# Altium PCB 7-seg-display-2-digits.PcbDoc
Units mm, origin at the board's own origin, x right, y up, seen from the top; angles counter-clockwise.
Board outline 110 x 82 mm, 2 copper layers (Top Layer, Bottom Layer); 47 components, 45 nets, 145 pads, 195 vias.
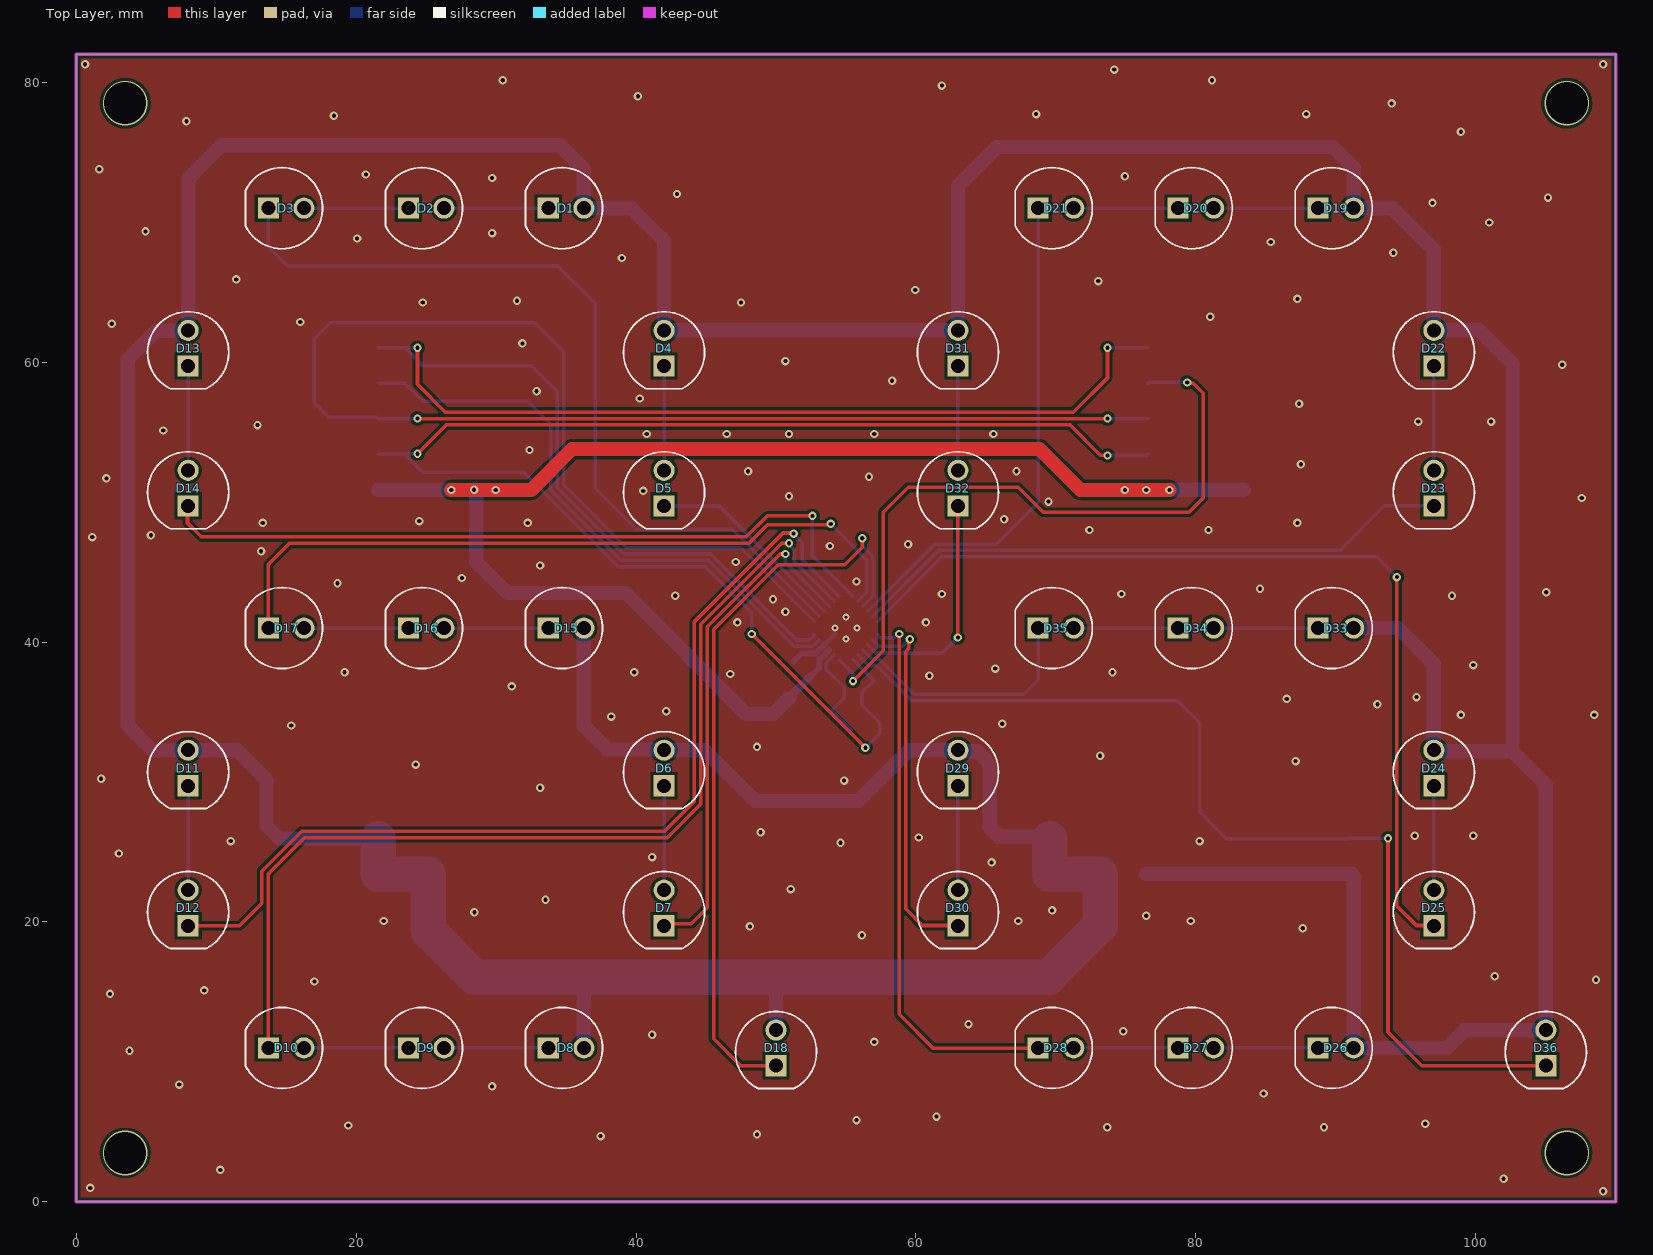
[diagram p0: Top Layer view]
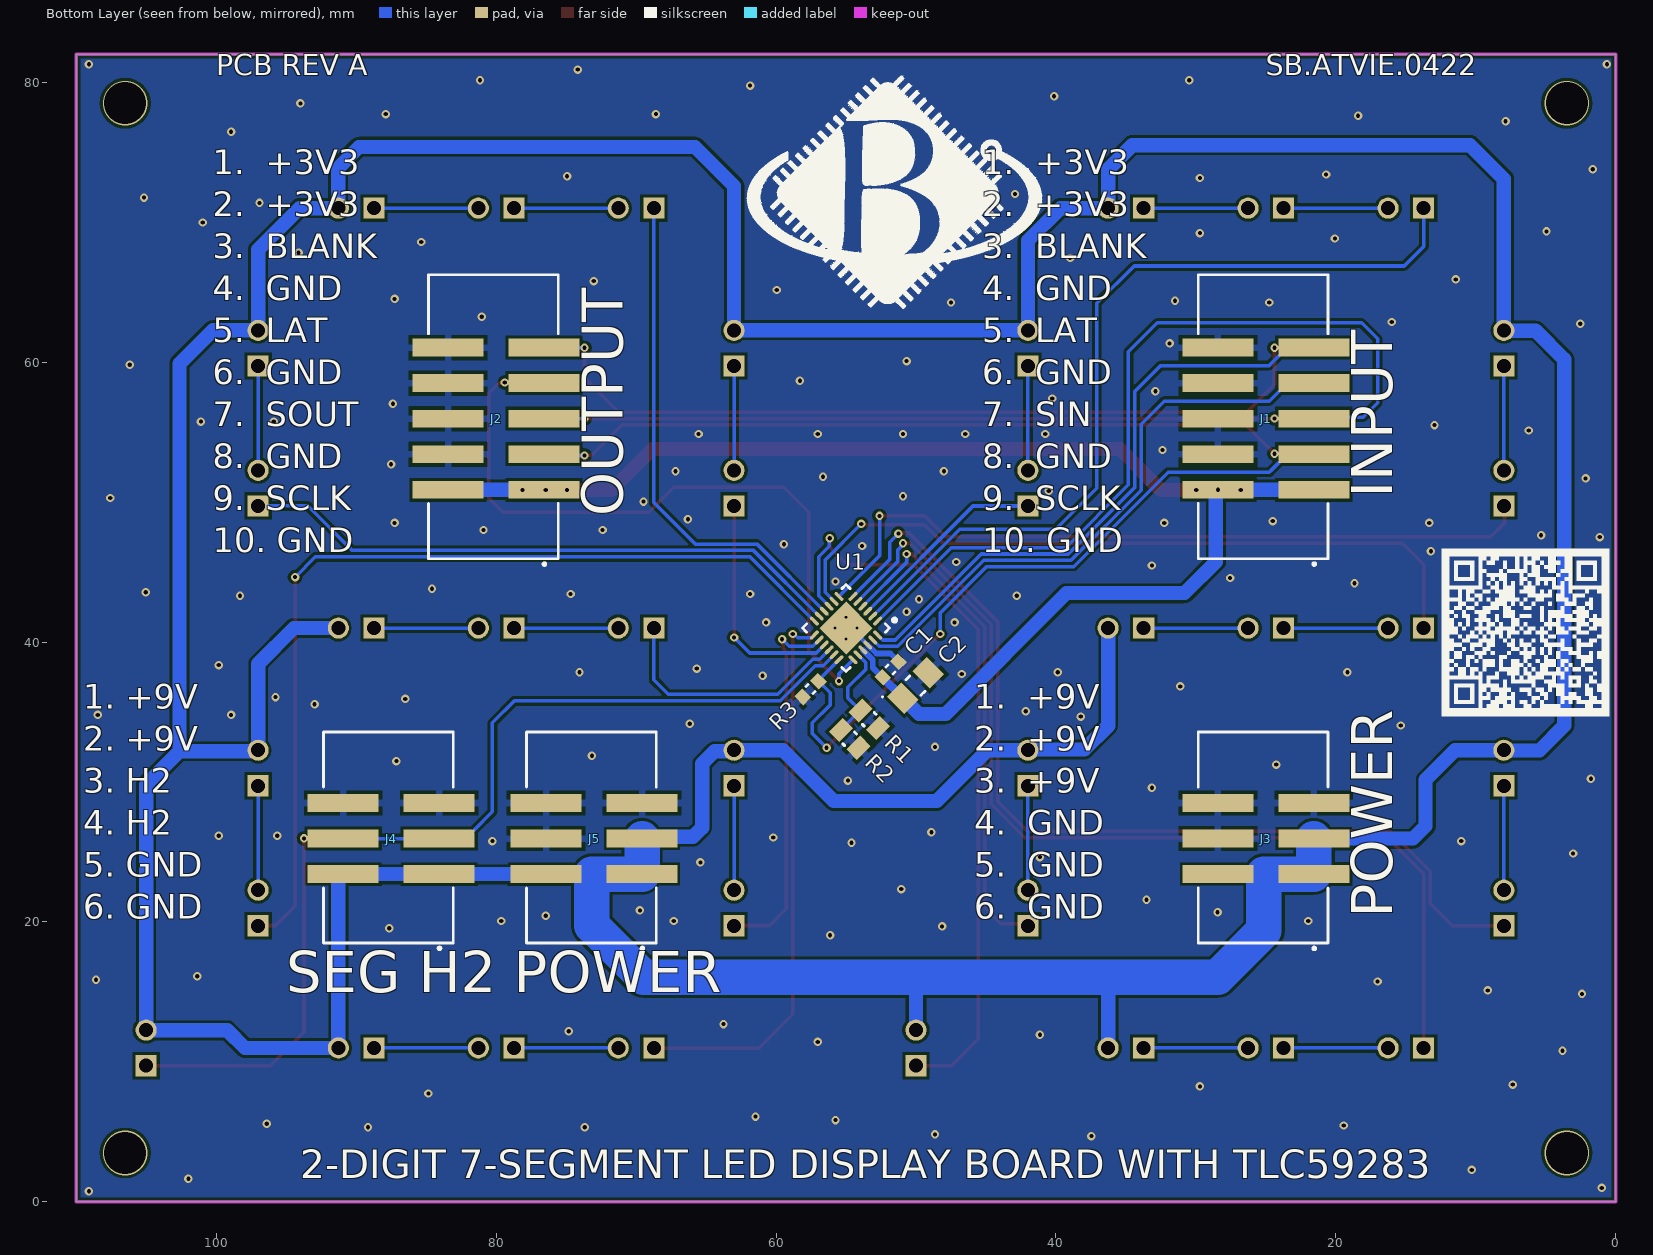
[diagram p1: Bottom Layer view, seen from below]
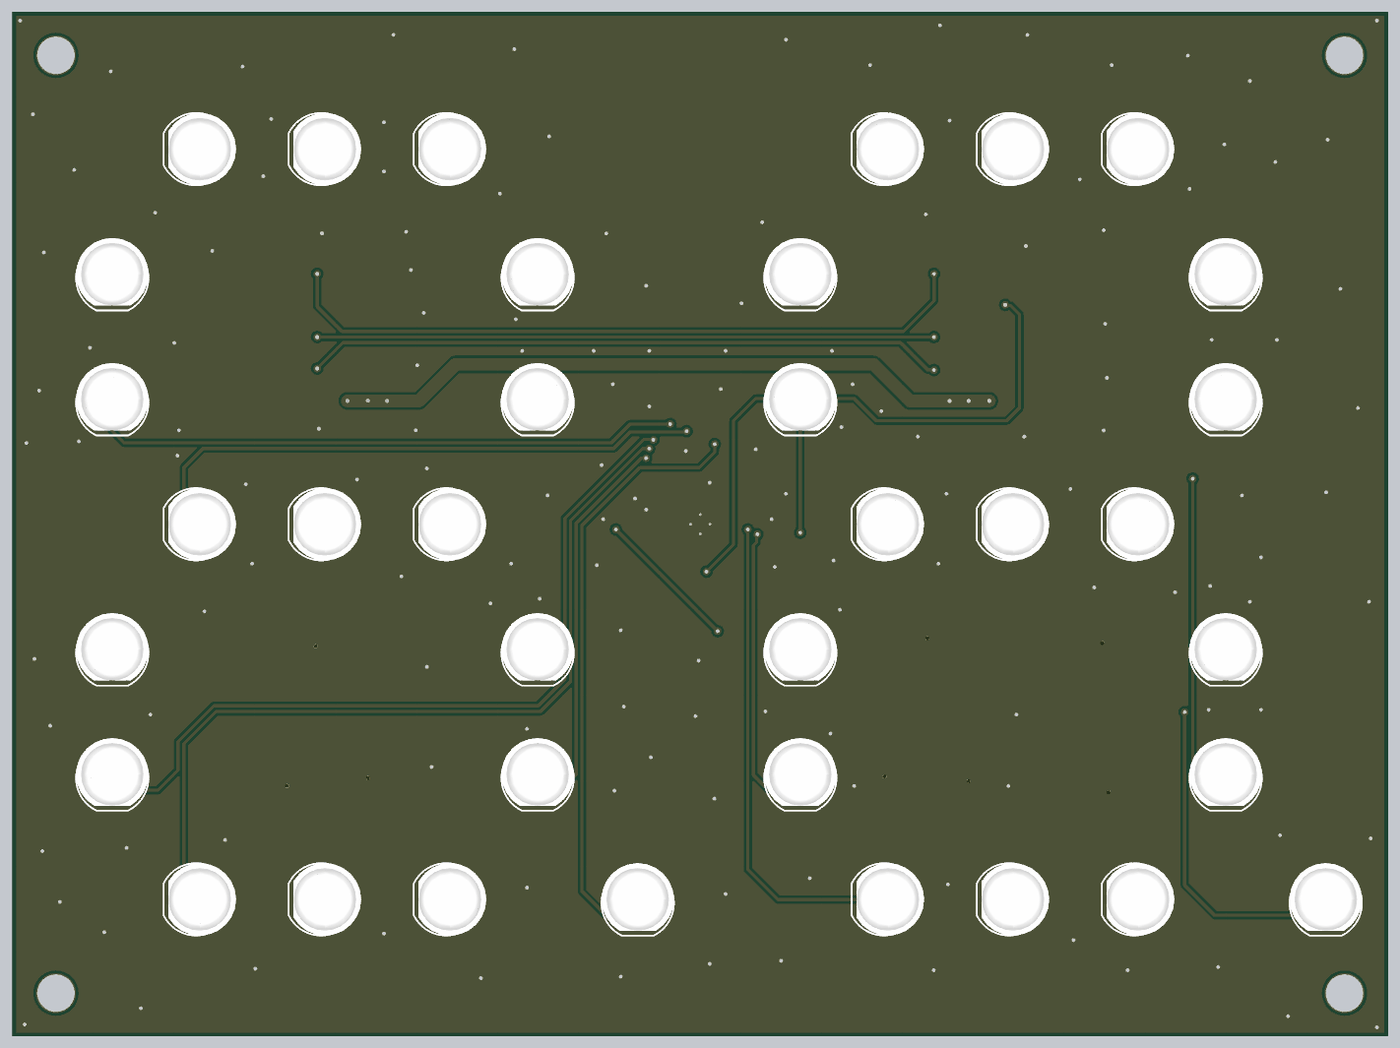
[diagram p2: 3D render of the assembled board from above, using the file's embedded part models]

## Layer stack, top to bottom
Top Solder: solder mask 0.0102, Solder Resist, Dk 3.5
Top Layer: signal copper 0.0356
Dielectric 1: dielectric 0.32, FR-4, Dk 4.8
Bottom Layer: signal copper 0.0356
Bottom Solder: solder mask 0.0102, Solder Resist, Dk 3.5

## Board outline
0,0 110,0 110,82 0,82

## Design rules (kind name [scope] priority, off if disabled: settings)
BoardOutlineClearance [All] p1: gap=0.051 ignorepadtopadclearanceinfootprint=FALSE except(0.4: Arc-SplitBarrior Arc-SplitContinuation Track-SplitBarrior Track-SplitContinuation SMDPad-SplitBarrior SMDPad-SplitContinuation THPad-SplitBarrior THPad-SplitContinuation Via-SplitBarrior Via-SplitContinuation Fill-SplitBarrior Fill-SplitContinuation Poly-SplitBarrior Poly-SplitContinuation Region-SplitBarrior Region-SplitContinuation Text-SplitBarrior Text-SplitContinuation)
Clearance "Clearance Bottom Layer" [OnLayer('Bottom Layer')] p1: gap=0.203 ignorepadtopadclearanceinfootprint=TRUE except(0.051: Arc-Arc Arc-Track Arc-SMDPad Track-Track Track-SMDPad SMDPad-SMDPad; 0.254: Arc-Text Track-Text SMDPad-Text THPad-Text Via-Text Fill-Text Poly-Text Region-Text Text-Text)
Clearance "Clearance Top Layer" [OnLayer('Top Layer')] p2: gap=0.203 ignorepadtopadclearanceinfootprint=TRUE except(0.254: Arc-Text Track-Text SMDPad-Text THPad-Text Via-Text Fill-Text Poly-Text Region-Text Text-Text)
Clearance [All] p3: gap=0.2 ignorepadtopadclearanceinfootprint=FALSE except(0.089: Arc-Arc Arc-Track Arc-SMDPad Track-Track Track-SMDPad SMDPad-SMDPad; 0.127: Arc-Via Track-Via SMDPad-Via THPad-Via Via-Via; 0.254: Arc-Text Track-Text SMDPad-Text THPad-Text Via-Text Fill-Text Poly-Text Region-Text Text-Text)
HoleSize [All] p1: absolutevalues=TRUE maxlimit=6.3 minlimit=0.2 maxpercent=80.000 minpercent=20.000
MinimumAnnularRing [All] p1: minimumring=0.076
MinimumSolderMaskSliver [All] p1: minsoldermaskwidth=0.025
PolygonConnect PolygonConnect_1 [All] p1: thpad.connectstyle=Relief thpad.reliefconductorwidth=0.508 thpad.reliefentries=4 thpad.polygonreliefangle="90 Angle" thpad.airgapwidth=0.254 smdpad.connectstyle=Relief smdpad.reliefconductorwidth=0.508 smdpad.reliefentries=4 smdpad.polygonreliefangle="90 Angle" smdpad.airgapwidth=0.254 via.connectstyle=Direct via.reliefconductorwidth=0.508 via.reliefentries=4 via.polygonreliefangle="90 Angle" via.airgapwidth=0.254
RoutingCorners [All] p1: cornerstyle=Round minsetback=2.54 maxsetback=2.54
RoutingVias [All] p1: holewidth=0.3 width=0.6 viastyle="Through Hole" minholewidth=0.3 minwidth=0.6 maxholewidth=1 maxwidth=2
SilkToSilkClearance [All] p1: silktosilkclearance=0.051
SilkToSolderMaskClearance [IsPad] p1: minsilkscreentomaskgap=0.051 clearancetoexposedcopper=TRUE
SolderMaskExpansion [All] p1: expansion=0.102
Width [All] p1: maxlimit=2.54 minlimit=0.089 preferedwidth=0.381
25 further rules are at their usual default settings.

## Components (designator, comment, footprint, x,y, rotation, side; value= is the part's Value field where it differs from the comment)
C1 "100nF/16V" "SMD 0603 GENERIC" 51.816,38.037 r315 bottom
C2 "10uF/16V" "SMD 1206 POLARIZED" 50.038,36.894 r135 bottom
D1 "OPT GEN LED 5MM" "THT LED 5MM" 35,71 r0 top locked
D2 "OPT GEN LED 5MM" "THT LED 5MM" 25,71 r0 top locked
D3 "OPT GEN LED 5MM" "THT LED 5MM" 15,71 r0 top locked
D4 "OPT GEN LED 5MM" "THT LED 5MM" 42,61 r90 top locked
D5 "OPT GEN LED 5MM" "THT LED 5MM" 42,51 r90 top locked
D6 "OPT GEN LED 5MM" "THT LED 5MM" 42,31 r90 top locked
D7 "OPT GEN LED 5MM" "THT LED 5MM" 42,21 r90 top locked
D8 "OPT GEN LED 5MM" "THT LED 5MM" 35,11 r0 top locked
D9 "OPT GEN LED 5MM" "THT LED 5MM" 25,11 r0 top locked
D10 "OPT GEN LED 5MM" "THT LED 5MM" 15,11 r0 top locked
D11 "OPT GEN LED 5MM" "THT LED 5MM" 8,31 r90 top locked
D12 "OPT GEN LED 5MM" "THT LED 5MM" 8,21 r90 top locked
D13 "OPT GEN LED 5MM" "THT LED 5MM" 8,61 r90 top locked
D14 "OPT GEN LED 5MM" "THT LED 5MM" 8,51 r90 top locked
D15 "OPT GEN LED 5MM" "THT LED 5MM" 35,41 r0 top locked
D16 "OPT GEN LED 5MM" "THT LED 5MM" 25,41 r0 top locked
D17 "OPT GEN LED 5MM" "THT LED 5MM" 15,41 r0 top locked
D18 "OPT GEN LED 5MM" "THT LED 5MM" 50,11 r90 top locked
D19 "OPT GEN LED 5MM" "THT LED 5MM" 90,71 r0 top locked
D20 "OPT GEN LED 5MM" "THT LED 5MM" 80,71 r0 top locked
D21 "OPT GEN LED 5MM" "THT LED 5MM" 70,71 r0 top locked
D22 "OPT GEN LED 5MM" "THT LED 5MM" 97,61 r90 top locked
D23 "OPT GEN LED 5MM" "THT LED 5MM" 97,51 r90 top locked
D24 "OPT GEN LED 5MM" "THT LED 5MM" 97,31 r90 top locked
D25 "OPT GEN LED 5MM" "THT LED 5MM" 97,21 r90 top locked
D26 "OPT GEN LED 5MM" "THT LED 5MM" 90,11 r0 top locked
D27 "OPT GEN LED 5MM" "THT LED 5MM" 80,11 r0 top locked
D28 "OPT GEN LED 5MM" "THT LED 5MM" 70,11 r0 top locked
D29 "OPT GEN LED 5MM" "THT LED 5MM" 63,31 r90 top locked
D30 "OPT GEN LED 5MM" "THT LED 5MM" 63,21 r90 top locked
D31 "OPT GEN LED 5MM" "THT LED 5MM" 63,61 r90 top locked
D32 "OPT GEN LED 5MM" "THT LED 5MM" 63,51 r90 top locked
D33 "OPT GEN LED 5MM" "THT LED 5MM" 90,41 r0 top locked
D34 "OPT GEN LED 5MM" "THT LED 5MM" 80,41 r0 top locked
D35 "OPT GEN LED 5MM" "THT LED 5MM" 70,41 r0 top locked
D36 "OPT GEN LED 5MM" "THT LED 5MM" 105,11 r90 top locked
J1 "CON SMD 10-PIN 2-ROW 2.54 WIDE" "SMD HEADER 2x5 2.54 WIDE" 25,58.5 r90 bottom locked
J2 "CON SMD 10-PIN 2-ROW 2.54 WIDE" "SMD HEADER 2x5 2.54 WIDE" 80,58.5 r90 bottom locked
J3 "CON SMD 6-PIN 2-ROW 2.54" "SMD HEADER 2x3 2.54" 25,28.5 r90 bottom locked
J4 "CON SMD 6-PIN 2-ROW 2.54" "SMD HEADER 2x3 2.54" 87.5,28.5 r90 bottom locked
J5 "CON SMD 6-PIN 2-ROW 2.54" "SMD HEADER 2x3 2.54" 73,28.5 r90 bottom locked
R1 "2K2" "SMD 0805 GENERIC" 53.34,34.481 r45 bottom
R2 "2K2" "SMD 0805 GENERIC" 54.737,33.084 r45 bottom
R3 "0R" "SMD 0603 GENERIC" 57.531,36.64 r315 bottom
U1 "TLC59283RGER" VQFN-24 55,41 r315 bottom

## Footprints (in the part's own frame and the unit in brackets; to place one, negate y for a bottom-side part, rotate by r counter-clockwise, add the part's x,y. Pads: shape width x height; smd on the part's side, far side on the other; paste and mask are expansions set on the pad)
"SMD 0603 GENERIC" [mm]
  rect 0.8x0.9 smd: 1(-0.8,0) 2(0.8,0)
  silkscreen extent -0.1,-0.35 0.1,0.35, body extent -0.85,-0.45 0.85,0.45, height 0.55
"SMD 0805 GENERIC" [mm]
  rect 1.05x1.4 smd: 1(-0.9,0) 2(0.9,0)
  silkscreen extent -0.1,-0.6 0.1,0.6, body extent -1.05,-0.7 1.05,0.7, height 0.6
"SMD 1206 POLARIZED" [mm] "BAUFORM A"
  rect 1.45x1.75 smd: 1(-1.3,0) 2(1.3,0)
  silkscreen extent -2.29,-0.77 0.2,1.14, body extent -1.65,-0.85 1.65,0.85, height 1.6
"SMD HEADER 2x3 2.54" [mil]
  rect 50x200 smd: 1(-200,-135) 2(-200,135) 3(-100,-135) 4(-100,135) 5(0,-135) 6(0,135)
  silkscreen extent -413,-175 200,190, body extent -400,-187 200,187, height 414
"SMD HEADER 2x5 2.54 WIDE" [mil]
  rect 50x200 smd: 1(-300,-135) 2(-300,135) 3(-200,-135) 4(-200,135) 5(-100,-135) 6(-100,135) 7(0,-135) 8(0,135) 9(100,-135) 10(100,135)
  silkscreen extent -513,-175 305,190, body extent -500,-220 300,220, height 450
"THT LED 5MM" [mm]
  round 1.508 hole 1: A(1.27,0)
  rect 1.508x1.508 hole 1: K(-1.27,0)
  silkscreen extent -2.9,-2.9 2.6,2.9, body extent -2.51,-2.9 2.9,2.9, height 12.1
VQFN-24 [mm]
  oval 0.8x0.25 smd: 1(-1.95,1.25) 2(-1.95,0.75) 3(-1.95,0.25) 4(-1.95,-0.25) 5(-1.95,-0.75) 6(-1.95,-1.25) 13(1.95,-1.25) 14(1.95,-0.75) 15(1.95,-0.25) 16(1.95,0.25) 17(1.95,0.75) 18(1.95,1.25)
  oval 0.25x0.8 smd: 7(-1.25,-1.95) 8(-0.75,-1.95) 9(-0.25,-1.95) 10(0.25,-1.95) 11(0.75,-1.95) 12(1.25,-1.95) 19(1.25,1.95) 20(0.75,1.95) 21(0.25,1.95) 22(-0.25,1.95) 23(-0.75,1.95) 24(-1.25,1.95)
  rect 2.7x2.7 smd: 25(0,0)
  silkscreen extent -2.97,-2.2 2.2,2.2, body extent -2.05,-2.05 2.05,2.05, height 1

## Part data
C1: library part "CAP SMD CER 100nF 16V 10% X7R 0603"
C2: library part "CAP SMD TAN 10uF 16V 10% 1206"
J1 J2: "HTST-105-01-SM-DV-P"
R1 R2: library part "RES SMD 2K2 1% 0805"
R3: library part "RES SMD 0R 0603"
U1: library part "LED DRV 16-CH TLC59283RGER"

## Via types
v1: diameter 0.6, hole 0.3, Top Layer to Bottom Layer, tented both sides, 187 vias
v2: diameter 0.5, hole 0.2, Top Layer to Bottom Layer, tented both sides, 4 vias
v3: diameter 3.2, hole 3, Top Layer to Bottom Layer, tented both sides, 4 vias

## Nets (pads, with @x,y where several pads share a name; then routed paths per layer and width w, separated by ;. In a path a pad name is that pad's centre, name@x,y a point inside that pad or via, vN(x,y) a via of type N, cw(c..) or ccw(c..) an arc to the next point about the centre after c; other vN are vias at no path point)
+3V3: C1.2 C2.1 J1.1 J1.2 J2.1 J2.2 U1.21 | length 101.6
  Top Layer w1.016: v1(26.797,50.864) 32.512,50.864 35.433,53.785 68.834,53.785 71.755,50.864 v1(78.105,50.864)
  Bottom Layer w0.305: C1.2 C1.2@52.393,37.471
  Bottom Layer w0.406: C1.2@52.393,37.471 53.086,38.164 53.086,38.732 U1.21
  Bottom Layer w0.61: C2.1 50.927,36.005 50.927,36.132 51.042,36.132 C1.2
  Bottom Layer w1.016: J1.1 J1.2@26.797,50.88 ; v1(28.429,50.88) 28.448,50.88 28.575,50.753 28.575,45.744 30.821,43.498 39.243,43.498 47.879,34.862 49.784,34.862 50.897,35.975 C2.1 ; J2.1@78.105,50.88 J2.2
  other v1: 29.972,50.864 74.93,50.864 76.454,50.864
+9V: D1.A D4.A D6.A D8.A D11.A D13.A D15.A D18.A D19.A D22.A D24.A D26.A D29.A D31.A D33.A D36.A J3.1 J3.2 J3.3 J4.1 J4.2 J5.1 J5.2 J5.3 | length 432.5
  Bottom Layer w1.016: J3.3 14.49,25.96 13.589,26.861 13.589,30.163 11.482,32.27 D11.A 7.988,32.258 5.461,32.258 3.683,34.036 3.683,60.198 5.722,62.237 7.967,62.237 D13.A 8,73.088 10.414,75.502 34.544,75.502 36.27,73.776 D1.A 39.681,71 42,68.681 D4.A D31.A 63,72.589 65.786,75.375 89.789,75.375 91.27,73.894 D19.A 94.037,71 97,68.037 D22.A 100.227,62.27 102.616,59.881 102.616,32.195 ; 36.195,16.066 36.27,15.991 D8.A ; D15.A 36.27,34.025 37.973,32.322 41.948,32.322 D6.A 44.883,32.27 48.514,28.639 55.88,28.639 59.511,32.27 D29.A 63.075,32.195 64.389,32.195 65.278,31.306 65.278,26.734 65.925,26.087 69.444,26.087 J5.3 ; 49.911,16.066 50,15.977 D18.A ; J5.2 J4.1 J4.2 91.143,23.42 91.27,23.293 D26.A 97.931,11 99.201,12.27 D36.A 105,29.811 102.616,32.195 ; D33.A 94.446,41 97,38.446 D24.A 97.075,32.195 102.616,32.195
  Bottom Layer w2.54: J3.3 J3.1 25.146,23.42 25.146,19.368 28.448,16.066 36.195,16.066 49.911,16.066 69.469,16.066 73.152,19.749 73.152,23.42 J5.1 J5.3
BLANK: J1.3 J2.3 R3.1 U1.18 | length 109.4
  Top Layer w0.254: v1(24.384,53.455) 26.441,55.512 71.018,55.512 73.177,53.353 73.66,53.353 v1(73.685,53.328) ; v1(48.26,40.577) v1(56.388,32.449)
  Bottom Layer w0.254: v1(24.384,53.455) 21.606,53.455 J1.3 23.476,53.42 24.635,52.261 24.638,52.261 24.765,52.134 31.981,52.134 38.737,45.378 44.96,45.378 48.26,42.078 v1(48.26,40.577) ; U1.18 56.965,37.267 R3.1 56.134,36.374 56.134,35.497 57.404,34.227 57.404,33.465 v1(56.388,32.449) ; v1(73.685,53.328) 76.479,53.328 J2.3
GND: C1.1 C2.2 J1.4 J1.6 J1.8 J1.10 J2.4 J2.6 J2.8 J2.10 J3.4 J3.5 J3.6 J4.5 J4.6 J5.4 J5.5 J5.6 R1.1 R2.1 R3.2 U1.22 U1.25 | length 4.2
  Bottom Layer w0.102: U1.25@54.222,40.576 v2(54.222,41)
  Bottom Layer w0.254: C1.1 C1.1@51.25,38.614
  Bottom Layer w0.305: U1.22 U1.25@54.222,40.576
  Bottom Layer w0.406: C1.1@51.25,38.614 51.816,39.18 52.826,39.18 U1.22
  other v1: 109.093,0.762 1,1 101.981,1.651 10.287,2.286 37.465,4.699 48.641,4.826 73.66,5.334 89.154,5.334 19.431,5.461 96.393,5.588 55.753,5.842 61.468,6.096 84.836,7.747 29.718,8.255 7.366,8.382 3.81,10.795 57.023,11.43 41.148,11.938 74.803,12.192 63.754,12.7 2.413,14.859 9.144,15.113 17.018,15.748 108.585,15.875 101.346,16.129 56.134,19.05 87.63,19.558 48.133,19.685 21.971,20.066 67.31,20.066 79.629,20.066 76.454,20.447 28.448,20.701 69.723,20.828 33.528,21.59 51.054,22.352 65.405,24.257 41.148,24.638 3.048,24.892 54.61,25.654 11.049,25.781 80.264,25.781 60.198,26.035 95.631,26.162 99.822,26.162 48.895,26.416 33.147,29.591 54.864,30.099 1.778,30.226 24.257,31.242 87.122,31.496 73.152,31.877 48.641,32.512 15.367,34.036 66.167,34.163 38.227,34.671 98.933,34.798 108.458,34.798 42.164,35.052 92.964,35.56 86.487,35.941 95.758,36.068 31.115,36.83 60.96,37.592 46.736,37.719 19.177,37.846 39.878,37.846 74.041,37.846 65.659,38.1 99.822,38.354 47.244,41.402 60.706,41.402 50.673,42.164 49.784,43.053 42.799,43.307 98.298,43.307 61.849,43.434 74.676,43.434 105.029,43.561 84.582,43.815 18.669,44.196 55.753,44.323 27.559,44.577 33.147,45.466 47.117,45.72 13.208,46.482 53.848,46.863 59.436,46.99 1.143,47.498 5.334,47.625 72.39,48.006 80.899,48.006 13.335,48.514 32.258,48.514 87.249,48.514 24.511,48.641 66.294,48.768 69.469,50.038 107.569,50.292 50.927,50.419 40.513,50.8 2.159,51.689 56.642,51.816 48.006,52.197 67.183,52.197 87.503,52.705 32.385,53.721 40.767,54.864 46.482,54.864 50.927,54.864 57.023,54.864 65.532,54.864 6.223,55.118 12.954,55.499 95.885,55.753 101.092,55.753 87.376,57.023 40.259,57.404 32.893,57.912 58.293,58.674 106.172,59.817 50.673,60.071 31.877,61.341 2.54,62.738 16.002,62.865 81.026,63.246 24.765,64.262 47.498,64.262 31.496,64.389 87.249,64.516 59.944,65.151 73.025,65.786 11.43,65.913 38.989,67.437 94.107,67.818 85.344,68.58 20.066,68.834 29.718,69.215 4.953,69.342 100.965,69.977 96.901,71.374 105.156,71.755 42.926,72.009 29.718,73.152 74.93,73.279 20.701,73.406 1.651,73.787 98.933,76.454 7.874,77.216 18.415,77.597 68.58,77.724 87.884,77.724 93.98,78.486 40.132,78.994 61.849,79.756 30.48,80.137 81.153,80.137 74.168,80.899 0.635,81.28 109.093,81.28
  other v2: 55,40.222 55.778,41 55,41.778
LAT: J1.5 J2.5 U1.1 | length 115.2
  Top Layer w0.254: v1(24.384,55.969) v1(73.685,55.969)
  Bottom Layer w0.254: v1(24.384,55.969) 21.58,55.969 J1.5 21.46,56.071 18.034,56.071 17.018,57.087 17.018,61.659 18.161,62.802 32.766,62.802 34.823,60.745 34.823,51.231 39.305,46.749 47.483,46.749 U1.1 ; v1(73.685,55.969) 76.53,55.969 76.555,55.944 J2.5
NetD1_K: D1.K D2.A | length 7.5
  Bottom Layer w0.254: D2.A D1.K
NetD2_K: D2.K D3.A | length 7.5
  Bottom Layer w0.254: D3.A D2.K
NetD4_K: D4.K D5.A | length 7.5
  Bottom Layer w0.254: D5.A D4.K
NetD6_K: D6.K D7.A | length 7.5
  Bottom Layer w0.254: D7.A D6.K
NetD8_K: D8.K D9.A | length 7.5
  Bottom Layer w0.254: D9.A D8.K
NetD9_K: D9.K D10.A | length 7.5
  Bottom Layer w0.254: D10.A D9.K
NetD11_K: D11.K D12.A | length 7.5
  Bottom Layer w0.254: D12.A D11.K
NetD13_K: D13.K D14.A | length 7.5
  Bottom Layer w0.254: D14.A D13.K
NetD15_K: D15.K D16.A | length 7.5
  Bottom Layer w0.254: D16.A D15.K
NetD16_K: D16.K D17.A | length 7.5
  Bottom Layer w0.254: D17.A D16.K
NetD19_K: D19.K D20.A | length 7.5
  Bottom Layer w0.254: D20.A D19.K
NetD20_K: D20.K D21.A | length 7.5
  Bottom Layer w0.254: D21.A D20.K
NetD22_K: D22.K D23.A | length 7.5
  Bottom Layer w0.254: D23.A D22.K
NetD24_K: D24.K D25.A | length 7.5
  Bottom Layer w0.254: D25.A D24.K
NetD26_K: D26.K D27.A | length 7.5
  Bottom Layer w0.254: D27.A D26.K
NetD27_K: D27.K D28.A | length 7.5
  Bottom Layer w0.254: D28.A D27.K
NetD29_K: D29.K D30.A | length 7.5
  Bottom Layer w0.254: D30.A D29.K
NetD31_K: D31.K D32.A | length 7.5
  Bottom Layer w0.254: D32.A D31.K
NetD33_K: D33.K D34.A | length 7.5
  Bottom Layer w0.254: D34.A D33.K
NetD34_K: D34.K D35.A | length 7.5
  Bottom Layer w0.254: D35.A D34.K
NetR1_2: R1.2 R2.2 U1.20 | length 7.1
  Bottom Layer w0.254: U1.20 53.594,38.533 53.594,38.037 54.864,36.767 54.864,36.005 R1.2 R2.2
SCLK: J1.9 J2.9 U1.24 | length 103.7
  Top Layer w0.254: v1(24.384,61.024) 24.384,58.408 26.365,56.427 71.247,56.427 73.685,58.865 v1(73.685,61.024)
  Bottom Layer w0.254: J1.9 21.587,61.024 J1.9@23.492,61.024 ; v1(24.384,61.024) J1.9@23.492,61.024 ; U1.24 52.734,40.505 52.375,40.145 51.486,40.145 45.339,46.292 39.116,46.292 34.366,51.042 34.366,57.9 32.512,59.754 24.762,59.754 J1.9@23.492,61.024 ; v1@73.66,61.024 v1(73.685,61.024) 76.555,61.024 J2.9
SEG_A1: D3.K U1.2 | length 60.8
  Bottom Layer w0.254: D3.K 13.716,70.986 13.716,68.263 15.113,66.866 34.417,66.866 37.084,64.199 37.084,50.991 40.005,48.07 46.869,48.07 U1.2
SEG_A2: D21.K U1.10 | length 36.4
  Bottom Layer w0.254: U1.10 61.357,47.003 65.761,47.003 68.73,49.973 D21.K
SEG_B1: D5.K U1.3 | length 14.6
  Bottom Layer w0.254: D5.K 42.009,49.721 45.925,49.721 U1.3
SEG_B2: D23.K U1.11 | length 43.4
  Bottom Layer w0.254: U1.11 61.607,46.546 90.272,46.546 93.456,49.73 D23.K
SEG_C1: D7.K U1.4 | length 36.5
  Top Layer w0.254: D7.K 42.146,19.876 43.942,19.876 45.085,21.019 45.085,41.085 50.292,46.292 v1(50.673,46.292)
  Bottom Layer w0.254: v1(50.673,46.292) 50.673,45.681 U1.4
SEG_C2: D25.K U1.12 | length 66.3
  Top Layer w0.254: v1(94.361,44.641) 94.361,21.146 95.758,19.749 96.981,19.749 D25.K
  Bottom Layer w0.254: U1.12 61.857,46.089 92.913,46.089 v1(94.361,44.641)
SEG_D1: D10.K U1.5 | length 72.4
  Top Layer w0.254: D10.K 13.716,11.014 13.716,23.432 16.307,26.023 42.226,26.023 44.628,28.424 44.628,41.274 50.407,47.054 v1(50.927,47.054)
  Bottom Layer w0.254: v1(50.927,47.054) 50.927,46.96 51.308,46.579 51.308,45.753 U1.5
SEG_D2: D28.K U1.13 | length 39.8
  Top Layer w0.254: v1(58.801,40.577) 58.801,13.399 61.214,10.986 68.716,10.986 D28.K
  Bottom Layer w0.254: U1.13 57.454,40.313 58.444,40.313 58.707,40.577 v1(58.801,40.577)
SEG_E1: D12.K U1.6 | length 69.6
  Top Layer w0.254: D12.K 11.665,19.73 13.259,21.324 13.259,23.621 16.117,26.48 42.037,26.48 44.171,28.614 44.171,41.464 50.5,47.793 51.158,47.793 51.202,47.749 v1(51.26,47.749)
  Bottom Layer w0.254: v1(51.26,47.749) 51.26,47.737 51.87,47.127 51.87,45.898 U1.6
SEG_E2: D30.K U1.14 | length 26.7
  Top Layer w0.254: v1(59.563,40.196) 59.497,40.13 59.497,39.546 59.258,39.307 59.258,20.943 60.452,19.749 62.981,19.749 D30.K
  Bottom Layer w0.254: U1.14 56.912,40.151 57.375,39.688 59.055,39.688 v1(59.563,40.196)
SEG_F1: D14.K U1.7 | length 53.9
  Top Layer w0.254: D14.K 7.95,49.68 7.95,48.502 8.941,47.511 47.879,47.511 49.378,49.01 v1(52.603,49.01)
  Bottom Layer w0.254: v1(52.603,49.01) 52.603,46.154 U1.7
SEG_F2: D32.K U1.15 | length 16.5
  Top Layer w0.254: v1(62.992,40.323) 62.992,49.722 D32.K
  Bottom Layer w0.254: U1.15 57.134,39.219 61.888,39.219 v1(62.992,40.323)
SEG_G1: D17.K U1.8 | length 52.8
  Top Layer w0.254: D17.K 13.73,45.544 15.24,47.054 48.068,47.054 49.394,48.38 53.853,48.38 v1(53.914,48.441)
  Bottom Layer w0.254: v1(53.914,48.441) 56.49,45.865 56.49,43.553 55.849,42.912 U1.8
SEG_G2: D35.K U1.16 | length 18
  Bottom Layer w0.254: U1.16 56.884,38.762 57.376,38.762 59.879,36.259 67.691,36.259 68.73,37.298 D35.K
SEG_H1: D18.K U1.9 | length 53.7
  Top Layer w0.254: D18.K 49.989,9.741 47.447,9.741 45.542,11.646 45.542,40.896 50.171,45.524 54.922,45.524 56.159,46.761 v1(56.159,47.41)
  Bottom Layer w0.254: v1(56.159,47.41) 56.185,47.384 56.185,46.851 56.947,46.089 56.947,43.3 U1.9
SEG_H2: D36.K J4.3 J4.4 U1.17 | length 73.2
  Top Layer w0.254: v1(93.726,25.972) 93.726,12.129 96.125,9.73 D36.K
  Bottom Layer w0.254: U1.17 56.634,38.305 57.187,38.305 59.69,35.802 78.689,35.802 80.264,34.227 80.264,27.877 81.534,26.607 81.534,26.592 82.166,25.96 J4.3 J4.4 90.941,25.972 v1(93.726,25.972)
SIN: J1.7 U1.23 | length 42.3
  Bottom Layer w0.254: J1.7 23.476,58.5 24.762,57.214 32.258,57.214 33.909,55.563 33.909,50.852 38.927,45.835 45.15,45.835 51.296,39.688 52.627,39.688 U1.23
SOUT: J2.7 U1.19 | length 51.4
  Top Layer w0.254: v1(55.499,37.211) 57.658,39.37 57.658,49.276 59.436,51.054 67.31,51.054 69.088,49.276 79.502,49.276 80.518,50.292 80.518,57.785 79.822,58.481 79.441,58.481 v1(79.375,58.547)
  Bottom Layer w0.254: U1.19 55.499,37.743 v1(55.499,37.211) ; J2.7 76.618,58.547 v1(79.375,58.547)
copper on no net:
  other v3: 3.5,3.5 106.5,3.5 3.5,78.5 106.5,78.5

## Polygon pours and split planes (outlines as drawn)
GND on Top Layer "Top Layer-GND" (solid, pour order 2): 0,82 110,82 110,0 0,0
GND on Bottom Layer "Bottom Layer-GND" (solid, pour order 4): 0,82 110,82 110,0 0,0

## Keep-outs
Keep-Out Layer:
  the board outline again, w0.254

## Silkscreen, mask and mechanical layers (free items; w line width, h text height)
Bottom Overlay:
  drawing of 13921 lines, arcs and shapes, not listed
  text "SB.ATVIE.0422" at 25,80.01 h2.54
  text "PCB REV A" at 100,80.01 h2.54
  text "INPUT" at 15,50.3 h5 r270
  text "OUTPUT" at 70,49 h5 r270
  text "1.  +3V3 / 2.  +3V3 / 3.  BLANK / 4.  GND / 5.  LAT / 6.  GND / 7.  SIN / 8.  GND / 9.  SCLK / 10. GND" at 45.25,45.85 h3
  text "1.  +3V3 / 2.  +3V3 / 3.  BLANK / 4.  GND / 5.  LAT / 6.  GND / 7.  SOUT / 8.  GND / 9.  SCLK / 10. GND" at 100.25,45.85 h3
  text "POWER" at 15,20.3 h5 r270
  text "1.  +9V / 2.  +9V / 3.  +9V / 4.  GND / 5.  GND / 6.  GND" at 45.85,19.65 h3
  text "1. +9V / 2. +9V / 3. H2 / 4. H2 / 5. GND / 6. GND" at 109.5,19.65 h3
  text "POWER" at 78.75,14 h5
  text "SEG H2" at 95,14 h5
  text "2-DIGIT 7-SEGMENT LED DISPLAY BOARD WITH TLC59283" at 93.98,1.016 h3.5